# EAGLE board humanoid-7 (EAGLE 7.2.0)
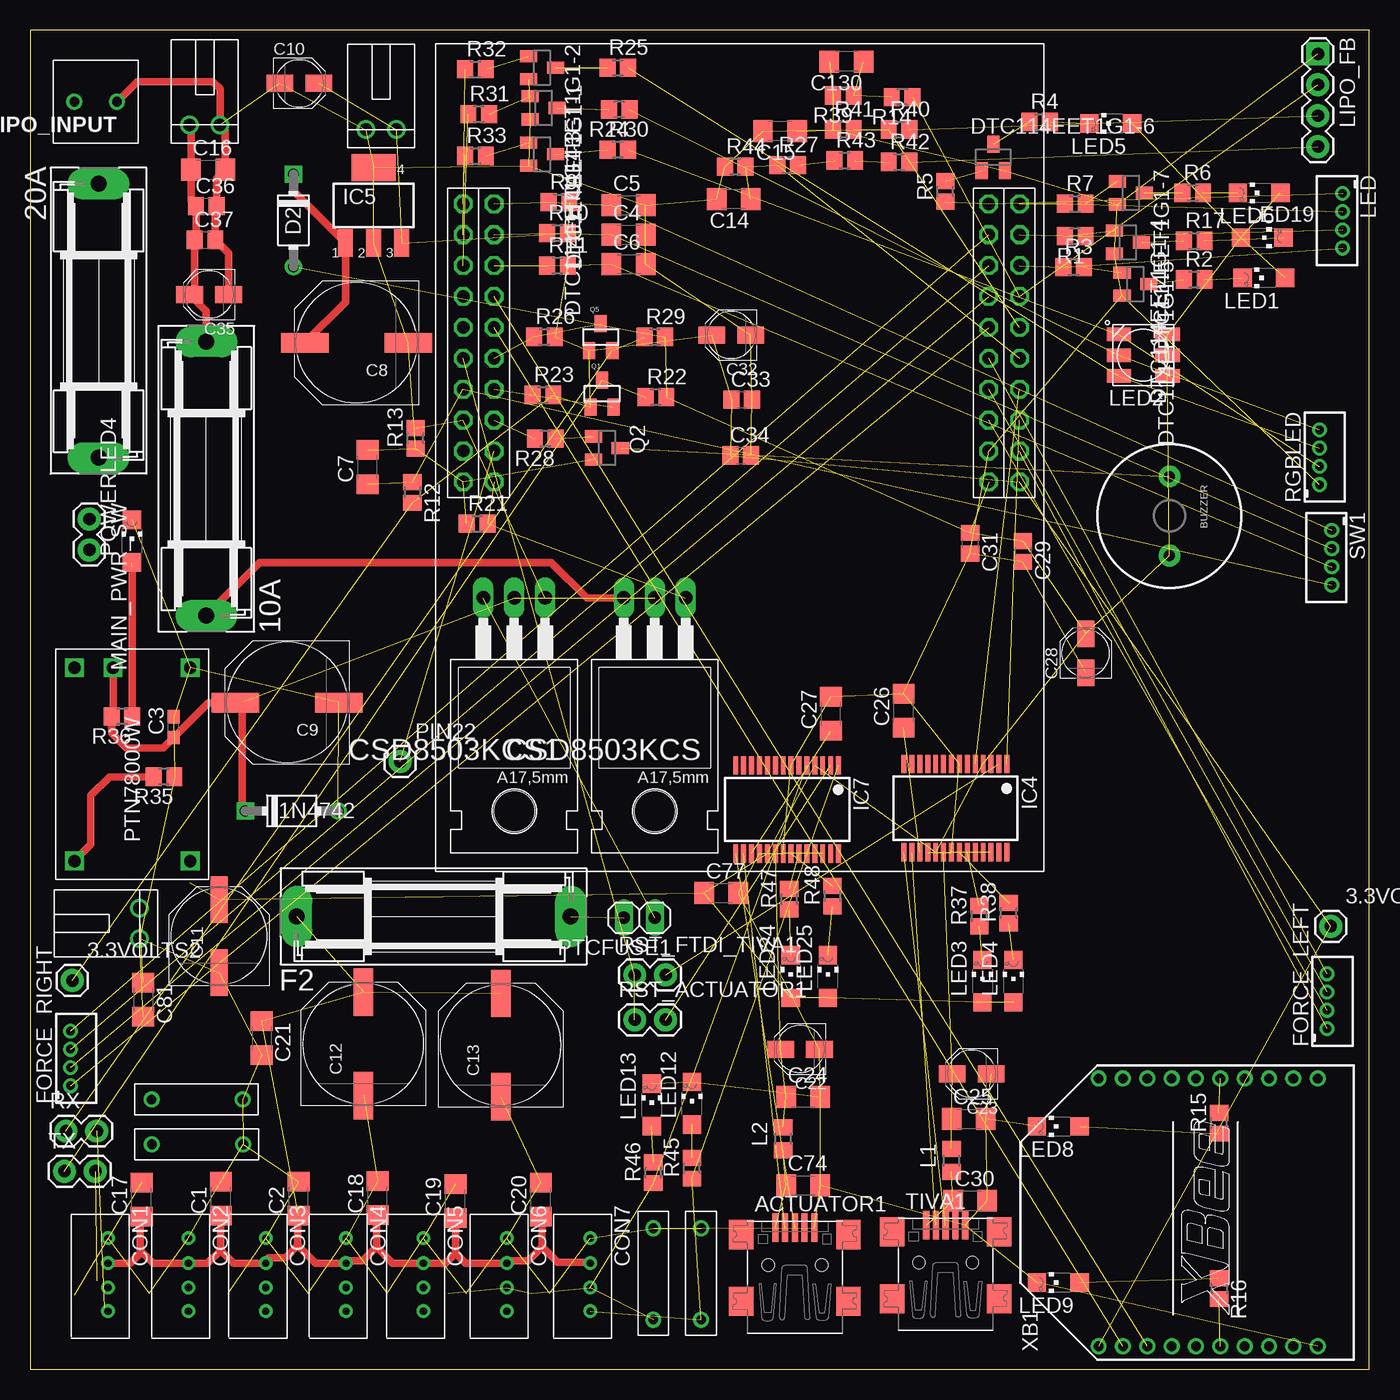
[diagram p0: board, top side]
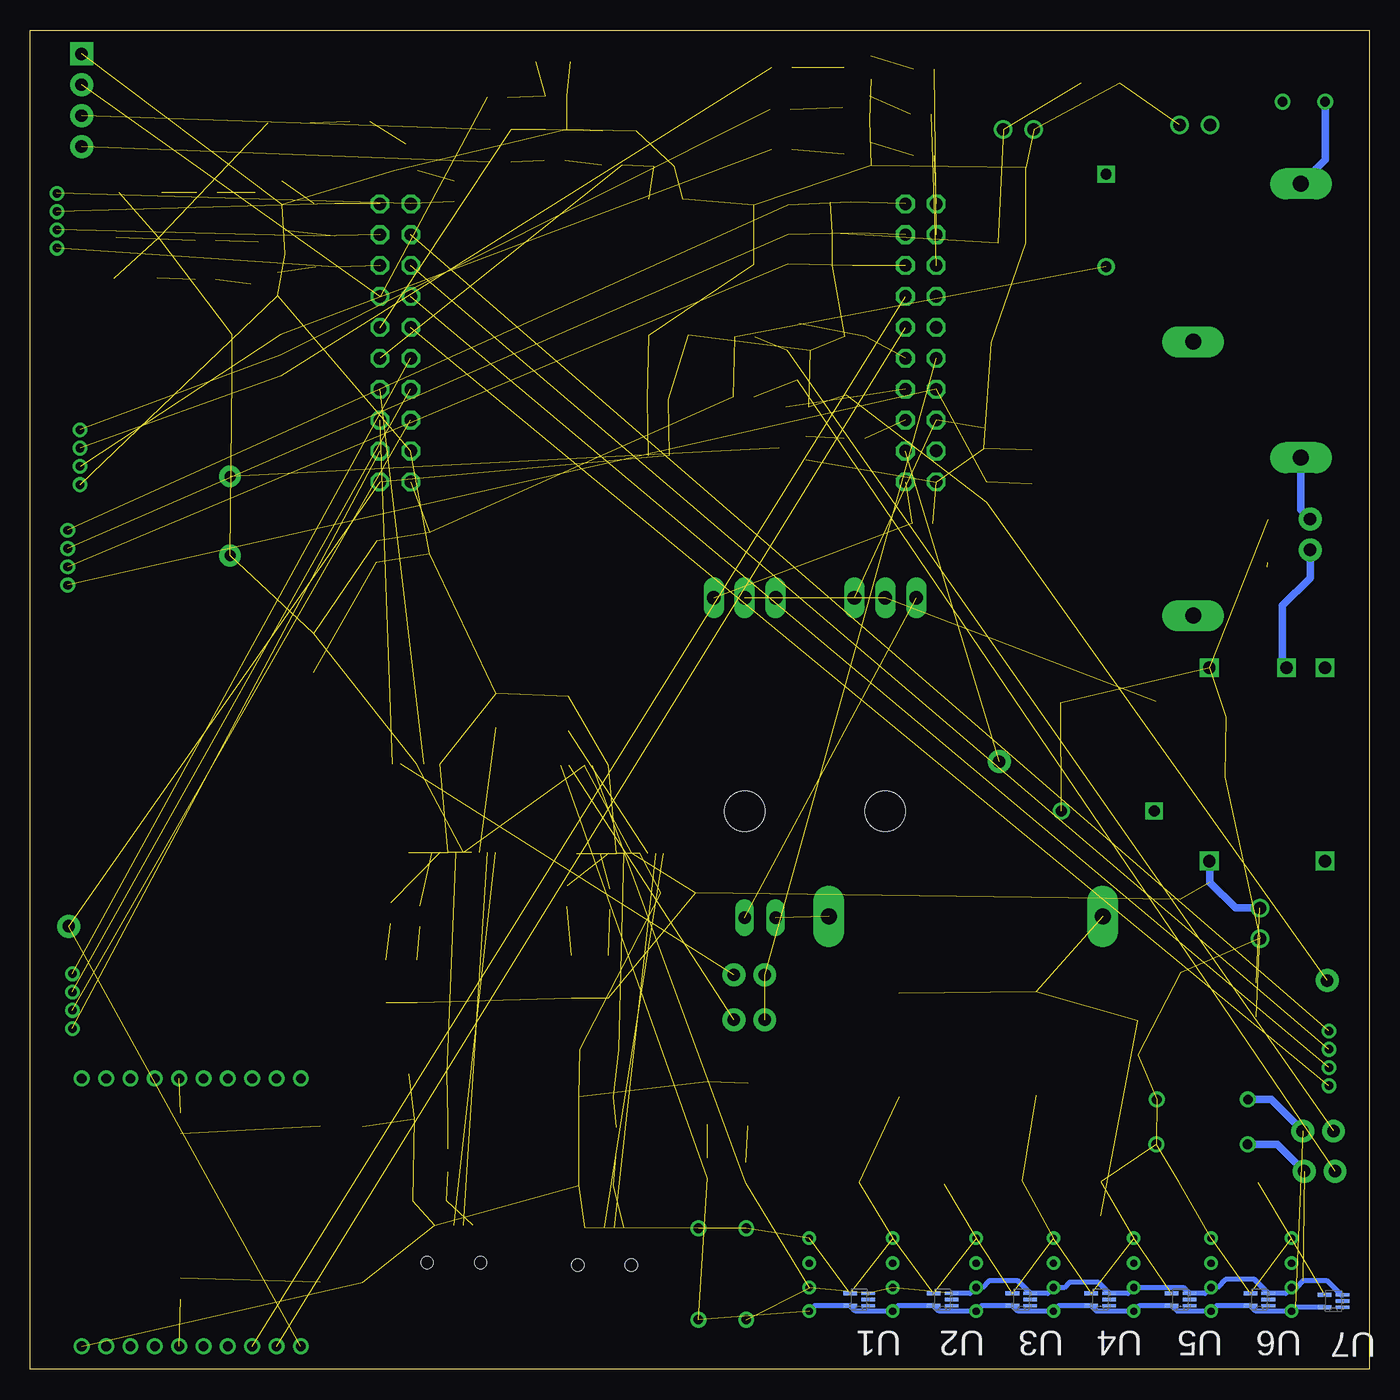
[diagram p1: board, bottom side, seen from below]

Size 110 x 110 mm. Coordinates in mm from the lower left corner, seen from the top.
Outline: 0,0 110,0 110,110 0,110 0,0
Copper layers (1*16): Top 0.035mm / dielectric 1.5mm / Bottom 0.035mm
Design rules "default *": minimum track width 10mil, minimum drill 24mil, track to track 0.4mm, track to pad 8mil, pad to pad 8mil, via to via 8mil, smd to smd 8mil, copper to edge 40mil, drill to drill 8mil, minimum pad ring 10mil, minimum via ring 8mil, stop-mask expansion 4mil, vias tented up to drill 0mil, thermal gap 10mil
Net classes: 0 default: width 0.35 mm

## Footprints (pad centres in the part's own frame; a part is rotated, then mirrored left to right if it is on the bottom)
DO41-3 = drill 0.9: A 3.81,0 | drill 0.9 square: C -3.81,0
2PINRIGHT = drill 1.02: P$1 0,0; P$2 2.5,0
1X01 = drill 1.016 pad 1.88: 1 0,0
SH22,5 = drill 1.321 pad 2.54 long: 1 -11.252,0; 2 11.252,0
USB-MINIB = smd 0.5 x 2.308: D+ 0,4.064; D- -0.8,4.064; GND 1.6,4.064; ID 0.8,4.064; VBUS -1.6,4.064 | smd 2 x 2.4: GND1 -4.4,-2; GND2 -4.4,3.5; GND3 4.4,3.5; GND4 4.4,-2 | hole 1: -2.2,1; 2.2,1
BUZZER-12MM = drill 0.9 pad 1.778: + 3.25,0; - -3.25,0
C1206 = smd 1.6 x 1.8: 1 -1.4,0; 2 1.4,0
C1608 = smd 1.1 x 1: 1 -0.85,0; 2 0.85,0
PANASONIC_G = smd 3.9 x 1.6: + 4.25,0; - -4.25,0
PANASONIC_B = smd 2.2 x 1.4: + 1.6,0; - -1.6,0
PANASONIC_E = smd 3.8 x 1.4: + 3,0; - -3,0
C0805 = smd 1.3 x 1.5: 1 -0.85,0; 2 0.85,0
B4B-ZR = drill 0.6: 1 7.95,-1.75; 2 6,-1.75; 3 4,-1.75; 4 1.95,-1.75
TO220 = drill 1.118 long: 1 -2.54,-6.35; 2 0,-6.35; 3 2.54,-6.35 | hole 3.302: 0,11.176
SOT23 = smd 1 x 1.4: 1 -0.95,-1.1; 2 0.95,-1.1; 3 0,1.1
B4B-ZR' = drill 0.7 pad 1.1: 1 -2.25,0; 2 -0.75,0; 3 0.75,0; 4 2.25,0
SSOP28 = smd 0.4 x 1.5: 1 -4.225,-3.625; 2 -3.575,-3.625; 3 -2.925,-3.625; 4 -2.275,-3.625; 5 -1.625,-3.625; 6 -0.975,-3.625; 7 -0.325,-3.625; 8 0.325,-3.625; 9 0.975,-3.625; 10 1.625,-3.625; 11 2.275,-3.625; 12 2.925,-3.625; 13 3.575,-3.625; 14 4.225,-3.625; 15 4.225,3.625; 16 3.575,3.625; 17 2.925,3.625; 18 2.275,3.625; 19 1.625,3.625; 20 0.975,3.625; 21 0.325,3.625; 22 -0.325,3.625; 23 -0.975,3.625; 24 -1.625,3.625; 25 -2.275,3.625; 26 -2.925,3.625; 27 -3.575,3.625; 28 -4.225,3.625
SOT223 = smd 1.219 x 2.235: 1 -2.311,-3.099; 2 0,-3.099; 3 2.311,-3.099 | smd 3.6 x 2.2: 4 0,3.099
L0805 = smd 1.3 x 1.5: 1 -0.95,0; 2 0.95,0
CHIPLED_1206 = smd 1.5 x 1.5: A 0,-1.75; C 0,1.75
RGBLED5050 = smd 2 x 1.1: 1 -2,1.7; 2 -2,0; 3 -2,-1.7; 4 2,-1.7; 5 2,0; 6 2,1.7
1X04 = drill 1.016 pad 1.88 square: 1 0,0 | drill 1.016 pad 1.88: 2 2.54,0; 3 5.08,0; 4 7.62,0
ED350V-02P = drill 0.8: P$1 0,0; P$2 3.5,0
1X02 = drill 1.016 pad 1.88: 1 0,0; 2 2.54,0
1X02' = drill 1.016 long: 1 -1.27,0; 2 1.27,0
R0805 = smd 1.3 x 1.5: 1 -0.85,0; 2 0.85,0
SOT50P160X60-5N = smd 1.118 x 0.254: 1 -0.737,0.508; 2 -0.737,0; 3 -0.737,-0.508 | smd 1.118 x 0.305: 4 0.737,-0.508; 5 0.737,0.508
TIVA = drill 1.02 octagon: P$1 0,0; P$2 2.54,0; P$3 5.08,0; P$4 7.62,0; P$5 10.16,0; P$6 12.7,0; P$7 15.24,0; P$8 17.78,0; P$9 20.32,0; P$10 22.86,0; P$11 0,2.54; P$12 2.54,2.54; P$13 5.08,2.54; P$14 7.62,2.54; P$15 10.16,2.54; P$16 12.7,2.54; P$17 15.24,2.54; P$18 17.78,2.54; P$19 20.32,2.54; P$20 22.86,2.54; P$21 0,43.18; P$22 2.54,43.18; P$23 5.08,43.18; P$24 7.62,43.18; P$25 10.16,43.18; P$26 12.7,43.18; P$27 15.24,43.18; P$28 17.78,43.18; P$29 20.32,43.18; P$30 22.86,43.18; P$31 0,45.72; P$32 2.54,45.72; P$33 5.08,45.72; P$34 7.62,45.72; P$35 10.16,45.72; P$36 12.7,45.72; P$37 15.24,45.72; P$38 17.78,45.72; P$39 20.32,45.72; P$40 22.86,45.72
PTN78000W = drill 1.02 square: P1 1.52,11.045; P2 1.52,4.705; P3 1.52,1.525; P4 17.4,1.52; P5 17.4,11.045
V18ZA2P = drill 0.8: P$1 0,0; P$2 7.5,0
XBEE = drill 0.8 pad 1.27: 1 -11,9; 2 -11,7; 3 -11,5; 4 -11,3; 5 -11,1; 6 -11,-1; 7 -11,-3; 8 -11,-5; 9 -11,-7; 10 -11,-9; 11 11,-9; 12 11,-7; 13 11,-5; 14 11,-3; 15 11,-1; 16 11,1; 17 11,3; 18 11,5; 19 11,7; 20 11,9

## Placement (x,y rotation side)
1N4742  [DO41-3]  21.47,45.87 0 top
3.3V1  2PINRIGHT  [2PINRIGHT]  27.56,101.85 0 top
3.3VOLTS1  M01PTH  [1X01]  106.86,36.39 0 top
3.3VOLTS2  M01PTH  [1X01]  3.45,31.93 0 top
5V1  2PINRIGHT  [2PINRIGHT]  8.97,35.38 90 top
10A  FUSESH22,5  [SH22,5]  14.45,73.16 90 top
20A  FUSESH22,5  [SH22,5]  5.6,86.14 270 top
ACTUATOR1  [USB-MINIB]  62.81,7.56 0 top
BUZZER  BUZZERPTH  [BUZZER-12MM]  93.6,70.1 270 top
C1  100nF  [C1206]  15.65,14 90 top
C2  100nF  [C1206]  22.03,14 90 top
C3  2.2uF  [C1608]  11.76,52.75 90 top
C4  0.1uF  [C1206]  49.15,93.22 0 top
C5  0.1uF  [C1206]  49.15,95.63 0 top
C6  0.1uF  [C1206]  49.15,90.81 0 top
C7  0.1uF  [C1206]  27.71,74.12 90 top
C8  220uF 25V  [PANASONIC_G]  26.8,84.33 180 top
C9  470uF 25V  [PANASONIC_G]  21.09,54.77 180 top
C10  22uF 10V  [PANASONIC_B]  22.1,105.66 0 top
C11  100uF 10V  [PANASONIC_E]  15.51,35.57 90 top
C12  220uF 25V  [PANASONIC_G]  27.36,26.73 90 top
C13  220uF 25V  [PANASONIC_G]  38.65,26.62 90 top
C14  100nF  [C1206]  57.78,96.14 180 top
C15  100nF  [C1206]  61.59,101.73 180 top
C16  100nF  [C1206]  14.61,98.55 0 top
C17  100nF  [C1206]  9.13,13.93 90 top
C18  100nF  [C1206]  28.54,14.06 90 top
C19  100nF  [C1206]  34.92,13.8 90 top
C20  100nF  [C1206]  41.94,13.93 90 top
C21  100nF  [C1206]  18.99,27.2 270 top
C22  4.7uF 10V  [PANASONIC_B]  63.25,26.29 180 top
C23  4.7uF 10V  [PANASONIC_B]  77.34,24.26 180 top
C24  100nF  [C1206]  63.5,22.35 0 top
C25  100nF  [C1206]  77.09,20.57 0 top
C26  100nF  [C1206]  71.75,54.1 90 top
C27  100nF  [C1206]  65.79,53.85 90 top
C28  10uF 16V  [PANASONIC_B]  86.72,58.83 90 top
C29  0.1uF  [C0805]  81.56,67.18 270 top
C30  10nF  [C1206]  77.22,13.84 0 top
C31  0.1uF  [C0805]  77.22,67.87 270 top
C32  10uF 16V  [PANASONIC_B]  57.58,84.96 180 top
C33  0.1uF  [C0805]  58.45,79.65 0 top
C34  0.1uF  [C0805]  58.37,75.08 0 top
C35  10uF 16V  [PANASONIC_B]  14.68,88.29 180 top
C36  0.1uF  [C0805]  14.45,95.55 0 top
C37  0.1uF  [C0805]  14.35,92.79 0 top
C74  10nF  [C1206]  63.5,15.11 0 top
C77  100nF  [C1206]  56.77,39.12 0 top
C81  100nF  [C1206]  9.27,30.35 270 top
C130  100nF  [C1206]  67.06,107.44 180 top
CON1  B4B-ZR  [B4B-ZR]  8.13,12.7 270 top
CON2  B4B-ZR  [B4B-ZR]  14.73,12.7 270 top
CON3  B4B-ZR  [B4B-ZR]  21.08,12.7 270 top
CON4  B4B-ZR  [B4B-ZR]  27.69,12.7 270 top
CON5  B4B-ZR  [B4B-ZR]  34.04,12.7 270 top
CON6  B4B-ZR  [B4B-ZR]  40.89,12.7 270 top
CON7  B4B-ZR  [B4B-ZR]  47.75,12.7 270 top
CSD8503KCS  BUZ20  [TO220]  51.31,57.02 180 top
CSD8503KCS1  BUZ20  [TO220]  39.75,57.02 180 top
D2  1N5817  [DO41-3]  21.61,94.39 270 top
DTC114EET1G1-1  [SOT23]  42.16,103.63 270 top
DTC114EET1G1-2  [SOT23]  42.04,106.93 270 top
DTC114EET1G1-3  [SOT23]  42.04,99.82 270 top
DTC114EET1G1-4  [SOT23]  90.17,92.58 270 top
DTC114EET1G1-5  [SOT23]  90.81,89.15 270 top
DTC114EET1G1-6  [SOT23]  79.12,99.57 0 top
DTC114EET1G1-7  [SOT23]  90.42,96.65 270 top
F2  FUSESH22,5  [SH22,5]  33.13,37.2 0 top
FITPC  2PINRIGHT  [2PINRIGHT]  13.08,102.23 0 top
FORCE_LEFT  B4B-ZR  [B4B-ZR']  106.55,30.23 90 top
FORCE_RIGHT  B4B-ZR  [B4B-ZR']  3.3,25.53 90 top
IC4  FT232RL  [SSOP28]  76.01,46.09 180 top
IC5  LM2936MP-3.3  [SOT223]  28.19,95.63 0 top
IC7  FT232RL  [SSOP28]  62.18,45.98 180 top
L1  33 mH 1.5A  [L0805]  75.69,17.14 90 top
L2  33 mH 1.5A  [L0805]  61.85,18.92 90 top
LED  B4B-ZR  [B4B-ZR']  107.82,94.36 270 top
LED1  [CHIPLED_1206]  101.35,89.66 90 top
LED2  RGBLED5050  [RGBLED5050]  91.44,83.31 180 top
LED3  [CHIPLED_1206]  78.23,31.88 0 top
LED4  [CHIPLED_1206]  80.77,31.88 0 top
LED5  [CHIPLED_1206]  88.77,102.36 90 top
LED6  [CHIPLED_1206]  100.97,96.65 90 top
LED8  [CHIPLED_1206]  84.45,19.94 90 top
LED9  [CHIPLED_1206]  84.45,7.11 90 top
LED12  [CHIPLED_1206]  54.36,21.84 0 top
LED13  [CHIPLED_1206]  51.05,21.72 0 top
LED19  [CHIPLED_1206]  101.22,92.96 270 top
LED24  [CHIPLED_1206]  62.48,32.26 0 top
LED25  [CHIPLED_1206]  65.53,32.26 0 top
LIPO_FB  [1X04]  105.79,108.08 270 top
LIPO_INPUT  ST02-3.5MM  [ED350V-02P]  7.11,104.14 180 top
MAIN_PWR_SW  [1X02]  4.84,69.85 270 top
PIN22  M01PTH  [1X01]  30.39,49.91 0 top
POWERLED4  [CHIPLED_1206]  8.34,68.04 0 top
PTCFUSE1  [1X02']  50.04,37.08 180 top
Q1  MOSFET-NCHANNELBSS138  [SOT23]  46.97,80.15 0 top
Q2  [SOT23]  47.37,75.69 270 top
Q5  MOSFET-NCHANNELBSS138  [SOT23]  46.86,84.8 0 top
R1  10K  [R0805]  85.85,93.09 180 top
R2  330E  [R0805]  95.63,89.53 0 top
R3  10K  [R0805]  85.72,90.55 0 top
R4  330E  [R0805]  82.93,102.49 0 top
R5  10K  [R0805]  75.18,96.77 90 top
R6  330E  [R0805]  95.5,96.65 0 top
R7  10K  [R0805]  85.85,95.76 0 top
R9  10K  [R0805]  43.43,95.89 0 top
R10  10K  [R0805]  43.31,93.34 0 top
R11  10K  [R0805]  43.31,90.68 0 top
R12  10K  [R0805]  31.39,72.03 270 top
R13  1M  [R0805]  31.65,76.48 90 top
R14  10k  [R0805]  71.63,104.52 180 top
R15  330R  [R0805]  97.66,20.19 90 top
R16  330R  [R0805]  97.66,6.6 270 top
R17  330E  [R0805]  95.63,92.71 0 top
R21  1M  [R0805]  36.7,69.47 0 top
R22  10K  [R0805]  51.4,79.88 0 top
R23  10K  [R0805]  42.12,80.05 0 top
R24  330E  [R0805]  48.39,103.5 180 top
R25  330E  [R0805]  48.26,106.93 0 top
R26  10K  [R0805]  42.24,84.83 0 top
R27  10k  [R0805]  62.23,98.93 0 top
R28  10k  [R0805]  42.29,76.45 180 top
R29  10K  [R0805]  51.31,84.81 0 top
R30  330E  [R0805]  48.26,100.2 0 top
R31  10K  [R0805]  36.83,103.12 0 top
R32  10K  [R0805]  36.58,106.81 0 top
R33  10K  [R0805]  36.58,99.69 0 top
R35  21K  [R0805]  10.99,48.67 180 top
R36  1k  [R0805]  7.53,53.62 180 top
R37  270E  [R0805]  77.98,37.21 90 top
R38  270E  [R0805]  80.39,37.47 90 top
R39  10k  [R0805]  66.8,104.65 180 top
R40  30k  [R0805]  71.37,101.85 0 top
R41  10k  [R0805]  66.8,101.85 0 top
R42  30k  [R0805]  71.37,99.19 0 top
R43  30k  [R0805]  66.93,99.31 0 top
R44  10k  [R0805]  57.91,98.81 0 top
R45  330E  [R0805]  54.36,16.51 90 top
R46  330E  [R0805]  51.18,16.13 90 top
R47  270E  [R0805]  62.36,38.61 90 top
R48  270E  [R0805]  65.91,38.86 90 top
RGBLED  B4B-ZR  [B4B-ZR']  105.92,74.93 90 top
RST_ACTUATOR1  [1X02]  49.66,28.7 0 top
RST_FTDI_TIVA1  [1X02]  49.66,32.38 0 top
RX  [1X02]  2.92,19.56 0 top
SW1  B4B-ZR  [B4B-ZR']  106.93,66.67 270 top
TIVA1  [USB-MINIB]  75.21,7.77 0 top
TX  [1X02]  2.79,16.26 0 top
U1  TPD2E2U06  [SOT50P160X60-5N]  41.91,5.71 180 bottom
U2  TPD2E2U06  [SOT50P160X60-5N]  35.05,5.71 180 bottom
U3  TPD2E2U06  [SOT50P160X60-5N]  28.57,5.71 180 bottom
U4  TPD2E2U06  [SOT50P160X60-5N]  22.1,5.71 180 bottom
U5  TPD2E2U06  [SOT50P160X60-5N]  15.49,5.71 180 bottom
U6  TPD2E2U06  [SOT50P160X60-5N]  9.02,5.71 180 bottom
U7  TPD2E2U06  [SOT50P160X60-5N]  2.92,5.59 180 bottom
U$1  TIVA  [TIVA]  81.28,72.9 90 top
U$4  PTN78000WTHROUGHHOLE  [PTN78000W]  2.09,59.15 270 top
V8ZA2P-1  V18ZA2P  [V18ZA2P]  17.45,22.15 180 top
V8ZA2P-2  V18ZA2P  [V18ZA2P]  17.48,18.47 180 top
V8ZA2P-3  V18ZA2P  [V18ZA2P]  55.12,4.06 90 top
V8ZA2P-4  V18ZA2P  [V18ZA2P]  51.18,4.06 90 top
XB1  XBEE  [XBEE]  96.78,12.88 90 top

## Library data of the parts
1N4742 D2 = gm-diodes; OC_NEWARK: unknown
3.3V1 5V1 FITPC = jst 2.5mm; OC_NEWARK: unknown
3.3VOLTS1 3.3VOLTS2 PIN22 = SparkFun-Connectors
10A 20A F2 = fuse; OC_FARNELL: unknown; OC_NEWARK: unknown
ACTUATOR1 C30 C74 C77 C81 LED1-LED6 LED12 LED13 LED19 LED24 LED25 POWERLED4 TIVA1 = adafruit; OC_NEWARK: unknown
BUZZER = SparkFun-Electromechanical
C1 C2 C14-C21 C24-C27 C130 = adafruit; MANUFACTURER: KEMET; OC_NEWARK: unknown; PARTNO: C1206C104K5RACTU
C3 = resistor; MANUFACTURER: TDK; MOUSER_PARTNO: 810-C1608X7R1A225K; PARTNO: C1608X7R1A225K080AC; SELLER: MOUSER
C4-C7 = adafruit; MANUFACTURER: Kemet; MOUSER_PARTNO: 80-C0805C104M5R; OC_NEWARK: unknown; PARTNO: C0805C104M5RACTU; SELLER: MOUSER
C8 C12 C13 = resistor; MANUFACTURER: PANASONIC ELECTRONIC COMPONENTS; MOUSER_PARTNO: 667-EEE-1EA221P; OC_NEWARK: unknown; PARTNO: EEE-1EA221P; SELLER: MOUSER ELECTRONICS
C9 = resistor; MANUFACTURER: PANASONIC ELECTRONIC COMPONENTS; OC_NEWARK: unknown; PARTNO: EEEFK1E471AP
C10 = resistor; MANUFACTURER: PANASONIC ELECTRONIC COMPONENTS; OC_NEWARK: unknown; PARTNO: EEEFK1A220AR
C11 = resistor; MANUFACTURER: Panasonic; MOUSER_PARTNO: 667-EEE-HA1A101P; OC_NEWARK: unknown; PARTNO: EEE-HA1A101P; SELLER: MOUSER ELECTRONICS
C22 C23 = resistor; MANUFACTURER: Panasonic; MOUSER_PARTNO: 667-10SVP4R7M; OC_NEWARK: unknown; PARTNO: 10SVP4R7M; SELLER: MOUSER
C28 C29 C31-C37 R15 R16 R28 = resistor
CON1-CON7 = jst_herkulex; MF: FARNELL; MPN: B4B-ZR(LF)(SN); OC_NEWARK: unknown
CSD8503KCS CSD8503KCS1 = transistor-fet; OC_NEWARK: unknown
DTC114EET1G1-1-DTC114EET1G1-7 = semicon-smd-ipc; OC_NEWARK: unknown
FORCE_LEFT FORCE_RIGHT LED RGBLED SW1 = con-jst; MF: FARNELL; MPN: B4B-ZR(LF)(SN); OC_FARNELL: 1830916; OC_NEWARK: unknown
IC4 IC7 = ftdichip; MPN: FT232RL; OC_FARNELL: 1146032; OC_NEWARK: unknown
IC5 = national-semiconductor; MF: NATIONAL SEMICONDUCTOR; MPN: LM2936MP-3.3/NOPB; OC_FARNELL: 1469062; OC_NEWARK: unknown
L1 L2 = rcl-2; MANUFACTURER: Laird Technologies; MOUSER_PARTNO: 875-MI0805K400R-10; OC_NEWARK: unknown; PARTNO: MI0805K400R-10; SELLER: MOUSER ELECTRONICS
LED8 LED9 = adafruit
LIPO_FB MAIN_PWR_SW RST_ACTUATOR1 RST_FTDI_TIVA1 RX TX = SparkFun; OC_NEWARK: unknown
LIPO_INPUT = con-dinkle; OC_NEWARK: unknown
PTCFUSE1 = pinhead; OC_NEWARK: unknown
Q1 Q5 = SparkFun-DiscreteSemi; OC_NEWARK: unknown; PROD_ID: TRANS-00830
Q2 = semicon-smd-ipc
R1-R7 R9-R14 R17 R21-R27 R29-R33 R35-R48 = resistor; OC_NEWARK: unknown
U1-U7 = ti_tpd2e2u06; MPN: TPD2E001IDRLRQ1; OC_FARNELL: -; OC_NEWARK: 55R7553; PACKAGE: SOT-23-5; SUPPLIER: Texas Instruments
U$1 = tiva; OC_NEWARK: unknown
U$4 = PTN78000W
V8ZA2P-1-V8ZA2P-4 = SparkFun-DiscreteSemi; OC_NEWARK: unknown
XB1 = maxstream; MPN: XBP24-Z7UIT-004; OC_FARNELL: 1751799; OC_NEWARK: 34R5507

## Nets
3.3V: 3.3V1.P$2 3.3VOLTS1.1 3.3VOLTS2.1 C10.+ C32.+ C33.1 C34.1 IC5.3 Q1.1 Q5.1 R9.2 R10.2 R11.2 R12.2 R23.2 R26.2 U$1.P$1 XB1.1
5V: 5V1.P$2 BUZZER.+ C11.+ C28.+ C29.1 C31.1 C77.1 C81.1 D2.A IC4.4 IC4.19 IC7.4 IC7.19 LED1.A LED2.1 LED2.3 LED3.A LED4.A LED5.A LED6.A LED19.A LED24.A LED25.A R22.2 R29.2 U$1.P$11 U$4.P5
GND: 1N4742.A 3.3V1.P$1 5V1.P$1 ACTUATOR1.GND C1.2 C2.2 C3.2 C4.2 C5.2 C6.2 C7.2 C8.- C9.- C10.- C11.- C12.- C13.- C14.2 C15.2 C16.2 C17.2 C18.2 C19.2 C20.2 C21.2 C22.- C23.- C24.2 C25.2 C26.2 C27.2 C28.- C29.2 C30.2 C31.2 C32.- C33.2 C34.2 C35.- C36.2 C37.2 C74.2 C77.2 C81.2 C130.2 CON1.4 CON2.4 CON3.4 CON4.4 CON5.4 CON6.4 CON7.4 DTC114EET1G1-1.2 DTC114EET1G1-2.2 DTC114EET1G1-3.2 DTC114EET1G1-4.2 DTC114EET1G1-5.2 DTC114EET1G1-6.2 DTC114EET1G1-7.2 FITPC.P$2 IC4.7 IC4.18 IC4.21 IC4.25 IC4.26 IC5.2 IC5.4 IC7.7 IC7.18 IC7.21 IC7.25 IC7.26 LED8.C LED9.C LED12.C LED13.C LIPO_FB.1 LIPO_INPUT.P$1 POWERLED4.C Q2.2 R13.1 R21.1 R35.1 R39.2 R41.1 R44.1 RGBLED.1 TIVA1.GND U1.4 U2.4 U3.4 U4.4 U5.4 U6.4 U7.4 U$1.P$12 U$1.P$31 U$4.P1 V8ZA2P-1.P$1 V8ZA2P-2.P$1 V8ZA2P-3.P$2 V8ZA2P-4.P$2 XB1.10
HX_RX: CON1.1 CON2.1 CON3.1 CON4.1 CON5.1 CON6.1 CON7.1 IC7.1 R45.1 RX.2 U1.5 U2.5 U3.5 U4.5 U5.5 U6.5 U7.5 V8ZA2P-1.P$2 V8ZA2P-3.P$1
HX_TX: CON1.2 CON2.2 CON3.2 CON4.2 CON5.2 CON6.2 CON7.2 IC7.5 R46.1 TX.2 U1.3 U2.3 U3.3 U4.3 U5.3 U6.3 U7.3 V8ZA2P-2.P$2 V8ZA2P-4.P$1
LIPO_FB4: LIPO_FB.4 R42.2
MOSFET_CTRL1: 10A.1 CSD8503KCS.3
MOSFET_CTRL2: CSD8503KCS1.3 PTCFUSE1.1
N$1: C130.1 R14.2 R39.1
N$2: C1.1 C2.1 C12.+ C13.+ C17.1 C18.1 C19.1 C20.1 C21.1 CON1.3 CON2.3 CON3.3 CON4.3 CON5.3 CON6.3 CON7.3 F2.1
N$3: C8.+ D2.C IC5.1
N$4: IC7.22 R48.2
N$5: IC7.23 R47.2
N$6: LED24.C R47.1
N$7: C30.1 L1.1 TIVA1.VBUS
N$8: LED25.C R48.1
N$9: 20A.2 MAIN_PWR_SW.1
N$10: C23.+ C25.1 IC4.20 L1.2
N$11: IC4.15 TIVA1.D+
N$12: IC4.16 TIVA1.D-
N$13: LED3.C R37.1
N$14: 20A.1 LIPO_INPUT.P$2
N$15: LED4.C R38.1
N$16: IC4.23 R37.2
N$17: IC4.22 R38.2
N$18: LED2.5 R24.1 RGBLED.4
N$19: R27.2 R43.1
N$20: BUZZER.- Q2.3
N$21: Q2.1 R28.1
N$22: DTC114EET1G1-4.1 R1.2
N$24: LED19.C R17.2
N$25: DTC114EET1G1-4.3 R17.1
N$26: DTC114EET1G1-5.1 R3.2
N$27: LED2.6 R25.2 RGBLED.3
N$28: LED2.4 R30.2 RGBLED.2
N$29: DTC114EET1G1-1.3 R24.2
N$30: DTC114EET1G1-2.3 R25.1
N$31: DTC114EET1G1-3.3 R30.1
N$32: LED1.C R2.2
N$33: DTC114EET1G1-5.3 R2.1
N$34: C26.1 IC4.17
N$35: IC4.2 RST_FTDI_TIVA1.2
N$36: DTC114EET1G1-6.1 R5.2
N$37: DTC114EET1G1-1.1 R31.2
N$38: DTC114EET1G1-2.1 R32.2
N$39: DTC114EET1G1-3.1 R33.2
N$40: LED5.C R4.2
N$41: DTC114EET1G1-6.3 R4.1
N$42: DTC114EET1G1-7.1 R7.2
N$43: LED6.C R6.2
N$44: DTC114EET1G1-7.3 R6.1
N$53: LED8.A R15.1
N$54: LED9.A R16.1
N$55: R15.2 XB1.15
N$56: R16.2 XB1.6
N$70: F2.2 PTCFUSE1.2
N$73: LED12.A R45.2
N$74: LED13.A R46.2
N$76: R35.2 U$4.P4
N$92: ACTUATOR1.VBUS C74.1 L2.1
N$93: C22.+ C24.1 IC7.20 L2.2
N$94: ACTUATOR1.D+ IC7.15
N$95: ACTUATOR1.D- IC7.16
N$115: C27.1 IC7.17
N$116: IC7.2 RST_ACTUATOR1.2
N$337: R42.1 R43.2
N$338: LIPO_FB.3 R40.2
N$378: 10A.2 C16.1 C35.+ C36.1 C37.1 FITPC.P$1
N$381: POWERLED4.A R36.1
P2: FORCE_LEFT.1 U$1.P$2
P3: IC4.1 U$1.P$3
P4: IC4.5 U$1.P$4
P5: C14.1 R27.1 R44.2 U$1.P$5
P6: C15.1 R40.1 R41.2 U$1.P$6
P7: LIPO_FB.2 R14.1 U$1.P$7
P8: LED.4 R3.1 U$1.P$8
P9: LED.3 R1.1 U$1.P$9
P10: LED.2 R7.1 U$1.P$10
P13: FORCE_LEFT.2 U$1.P$13
P14: FORCE_LEFT.3 U$1.P$14
P15: FORCE_LEFT.4 U$1.P$15
P16: FORCE_RIGHT.1 U$1.P$16
P17: FORCE_RIGHT.2 U$1.P$17
P18: FORCE_RIGHT.3 U$1.P$18
P19: FORCE_RIGHT.4 U$1.P$19
P20: LED.1 R5.1 U$1.P$20
P21: CSD8503KCS.1 R21.2 U$1.P$21
P22: PIN22.1 U$1.P$22
P23: R28.2 U$1.P$23
P24: Q1.2 R23.1 U$1.P$24
P25: Q5.3 R26.1 U$1.P$25
P28: C6.1 R11.1 SW1.3 U$1.P$28
P29: C4.1 R10.1 SW1.2 U$1.P$29
P30: C5.1 R9.1 SW1.1 U$1.P$30
P33: CSD8503KCS1.1 R13.2 U$1.P$33
P34: C7.1 R12.1 SW1.4 U$1.P$34
P35: RST_ACTUATOR1.1 RST_FTDI_TIVA1.1 U$1.P$35
P38: R31.1 U$1.P$38
P39: R32.1 U$1.P$39
P40: R33.1 U$1.P$40
RX3: U$1.P$26 XB1.2
TIVA_RX: Q1.3 R22.1 TX.1
TIVA_TX: Q5.2 R29.1 RX.1
TX3: U$1.P$27 XB1.3
VCC: 1N4742.C C3.1 C9.+ CSD8503KCS1.2 CSD8503KCS.2 MAIN_PWR_SW.2 R36.2 U$4.P2

## Tracks (layer width: path | path; a pad name or v marks a point on that pad's centre or on a via)
3.3V  (17 unrouted)
5V  (25 unrouted)
  Bottom 0.61: 5V1.P$2 10.96,37.88 13.08,40.01 13.08,41.7 U$4.P5
GND  (97 unrouted)
  Top 0.61: LIPO_INPUT.P$1 8.76,105.79 14.99,105.79 15.58,105.2 FITPC.P$2 16,101.81 C16.2 15.3,97.85 C36.2 15.2,95.45 C37.2 16.28,91.71 C35.-
HX_RX  (4 unrouted)
  Bottom 0.406: U7.5 6.05,5.08 CON1.1 9.3,4.75 U6.5 12.53,5.21 CON2.1 15.77,4.75 U5.5 18.88,5.21 CON3.1 22.38,4.75 U4.5 25.48,5.21 CON4.1 28.86,4.75 U3.5 31.83,5.21 CON5.1 35.33,4.75 U2.5 38.69,5.21 CON6.1 42.19,4.75 U1.5 45.55,5.21 CON7.1
  Bottom 0.61: RX.2 8.05,22.15 V8ZA2P-1.P$2
HX_TX  (7 unrouted)
  Bottom 0.406: U7.3 2.29,6.1 3.43,7.24 5.46,7.24 6,6.7 CON1.2 6.86,6.22 U6.3 9.42,7.37 11.81,7.37 12.48,6.7 CON2.2 13.46,6.22 U5.3 15.23,6.7 CON3.2 19.81,6.22 U4.3 22.25,7.11 24.64,7.11 25.05,6.7 CON4.2 26.41,6.22 U3.3 28.85,7.24 31.24,7.24 31.78,6.7 CON5.2 32.76,6.22 U2.3
  Bottom 0.61: TX.2 7.54,18.47 V8ZA2P-2.P$2
LIPO_FB4  (1 unrouted)
MOSFET_CTRL1
  Top 0.61: 10A.1 18.84,66.29 42.8,66.29 45.72,63.37 CSD8503KCS.3
MOSFET_CTRL2  (1 unrouted)
N$1  (2 unrouted)
N$2  (4 unrouted)
  Top 0.61: CON1.3 8.19,8.7 9.02,9.53 9.02,9.78 | 9.02,9.78 9.02,12.42 C17.1 | 9.02,9.78 10.1,8.7 CON2.3 14.54,8.7 15.62,9.78 | 15.62,9.78 15.62,12.57 C1.1 | 15.62,9.78 16.7,8.7 CON3.3 19.33,8.92 19.56,9.14 20.95,9.14 21.97,10.16 | 21.97,10.16 21.97,12.54 C2.1 | 21.97,10.16 23.43,8.7 CON4.3 25.94,8.79 26.04,8.89 27.3,8.89 28.45,10.03 | 28.45,10.03 28.45,12.56 C18.1 | 28.45,10.03 29.78,8.7 CON5.3 34.1,8.7 34.92,9.53 | 34.92,9.53 C19.1 | 34.92,9.53 35.75,8.7 CON6.3 39.31,8.7 39.5,8.89 40.89,8.89 42.04,10.03 | 42.04,10.03 42.04,12.43 C20.1 | CON7.3 46,8.73 45.97,8.76 43.31,8.76 42.04,10.03
N$3
  Top 0.61: C8.+ 25.88,87.66 IC5.1 21.61,96.81 D2.C
N$4  (1 unrouted)
N$5  (1 unrouted)
N$6  (1 unrouted)
N$7  (2 unrouted)
N$8  (1 unrouted)
N$9
  Bottom 0.61: 20A.2 5.6,70.61 MAIN_PWR_SW.1
N$10  (3 unrouted)
N$11  (1 unrouted)
N$12  (1 unrouted)
N$13  (1 unrouted)
N$14
  Bottom 0.61: LIPO_INPUT.P$2 3.61,99.38 20A.1
N$15  (1 unrouted)
N$16  (1 unrouted)
N$17  (1 unrouted)
N$18  (2 unrouted)
N$19  (1 unrouted)
N$20  (1 unrouted)
N$21  (1 unrouted)
N$22  (1 unrouted)
N$24  (1 unrouted)
N$25  (1 unrouted)
N$26  (1 unrouted)
N$27  (2 unrouted)
N$28  (2 unrouted)
N$29  (1 unrouted)
N$30  (1 unrouted)
N$31  (1 unrouted)
N$32  (1 unrouted)
N$33  (1 unrouted)
N$34  (1 unrouted)
N$35  (1 unrouted)
N$36  (1 unrouted)
N$37  (1 unrouted)
N$38  (1 unrouted)
N$39  (1 unrouted)
N$40  (1 unrouted)
N$41  (1 unrouted)
N$42  (1 unrouted)
N$43  (1 unrouted)
N$44  (1 unrouted)
N$53  (1 unrouted)
N$54  (1 unrouted)
N$55  (1 unrouted)
N$56  (1 unrouted)
N$70  (1 unrouted)
N$73  (1 unrouted)
N$74  (1 unrouted)
N$76
  Top 0.61: R35.2 6.51,48.67 4.95,47.12 4.95,43.1 U$4.P4
N$92  (2 unrouted)
N$93  (3 unrouted)
N$94  (1 unrouted)
N$95  (1 unrouted)
N$115  (1 unrouted)
N$116  (1 unrouted)
N$337  (1 unrouted)
N$338  (1 unrouted)
N$378
  Top 0.61: FITPC.P$1 13.21,102.23 C16.1 13.21,95.95 C36.1 13.6,92.89 C37.1 13.5,88.71 C35.+ 14.45,86.92 10A.2
N$381  (1 unrouted)
  Top 0.61: R36.1 8.38,65.91
P2  (1 unrouted)
P3  (1 unrouted)
P4  (1 unrouted)
P5  (3 unrouted)
P6  (3 unrouted)
P7  (2 unrouted)
P8  (2 unrouted)
P9  (2 unrouted)
P10  (2 unrouted)
P13  (1 unrouted)
P14  (1 unrouted)
P15  (1 unrouted)
P16  (1 unrouted)
P17  (1 unrouted)
P18  (1 unrouted)
P19  (1 unrouted)
P20  (2 unrouted)
P21  (2 unrouted)
P22  (1 unrouted)
P23  (1 unrouted)
P24  (2 unrouted)
P25  (2 unrouted)
P28  (3 unrouted)
P29  (3 unrouted)
P30  (3 unrouted)
P33  (2 unrouted)
P34  (3 unrouted)
P35  (2 unrouted)
P38  (1 unrouted)
P39  (1 unrouted)
P40  (1 unrouted)
RX3  (1 unrouted)
TIVA_RX  (2 unrouted)
TIVA_TX  (2 unrouted)
TX3  (1 unrouted)
VCC  (2 unrouted)
  Top 0.61: U$4.P2 6.79,53.74 R36.2 6.67,52.25 7.87,51.05 10.92,51.05 C3.1 14.6,54.74 17.4,54.74 | 17.4,54.74 17.43,54.77 | 17.53,54.86 17.43,54.77 | 17.43,54.77 C9.+ | 1N4742.C 17.4,46.13 17.4,54.74
  Bottom 0.61: MAIN_PWR_SW.2 4.84,65.01 7.11,62.74 7.11,57.95 U$4.P2